# EAGLE board MTC2-Template (EAGLE 7.5.0)
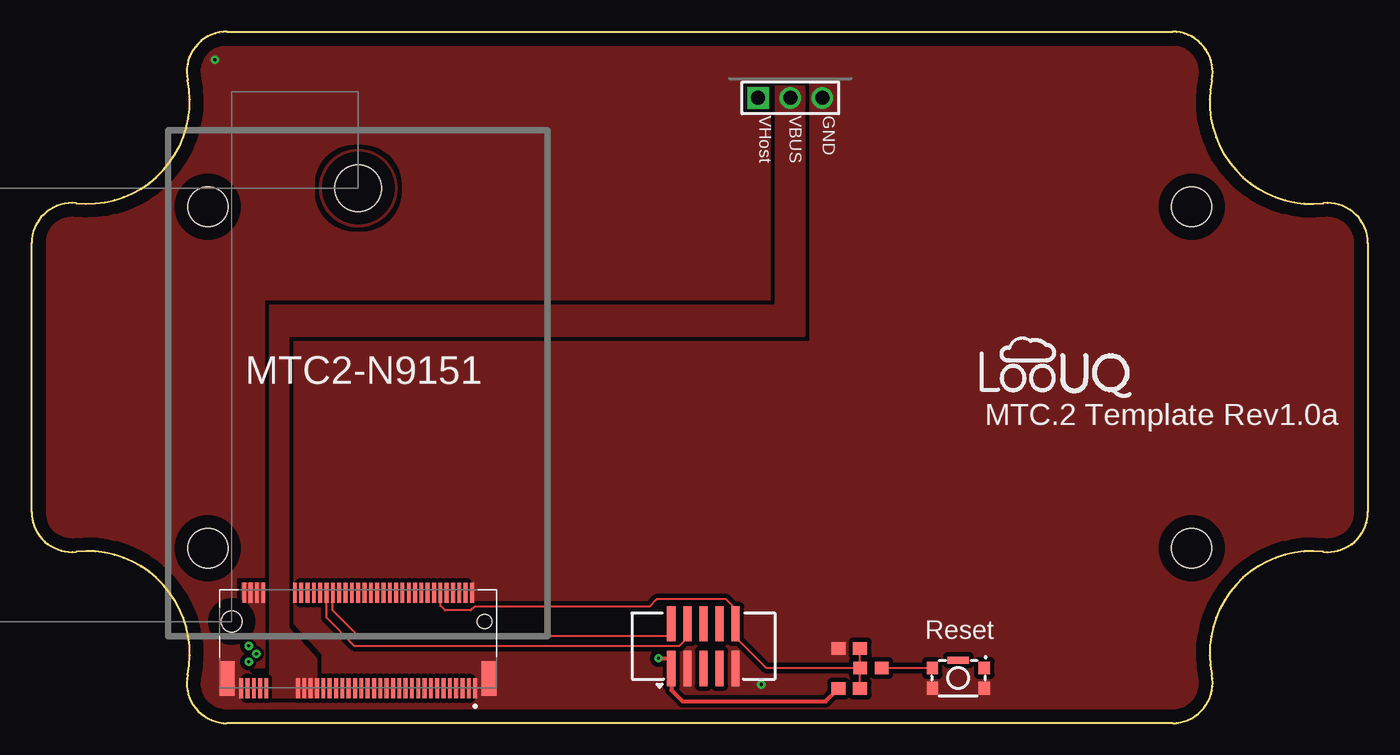
[diagram p0: board, top side]
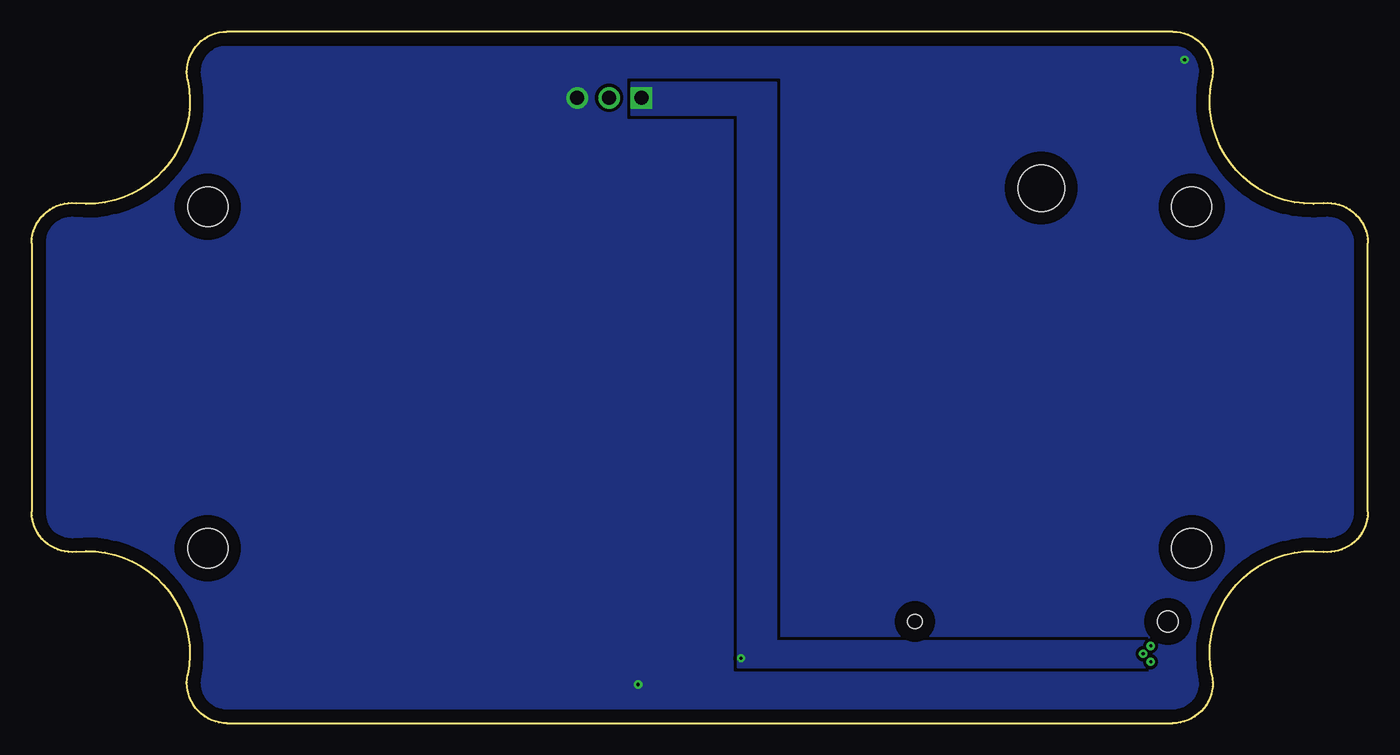
[diagram p1: board, bottom side, seen from below]

Size 105.65 x 54.66 mm. Coordinates in mm from the lower left corner, seen from the top.
Outline: 15.44,54.66 arc102 12.33,50.83 arc-108 3.52,41.1 arc96 0,37.95 0,16.71 arc96 3.52,13.55 arc-108 12.33,3.83 arc102 15.44,0 90.21,0 arc102 93.31,3.83 arc-108 102.13,13.55 arc96 105.65,16.71 105.65,37.95 arc96 102.13,41.1 arc-108 93.31,50.83 arc102 90.21,54.66 15.44,54.66
Copper layers (1*16): Top 0.035mm / dielectric 1.5mm / Bottom 0.035mm
Design rules "default *": minimum track width 10mil, minimum drill 0.61mm, track to track 8mil, track to pad 8mil, pad to pad 8mil, via to via 8mil, smd to smd 8mil, copper to edge 40mil, drill to drill 8mil, minimum pad ring 0mil, minimum via ring 8mil, stop-mask expansion 2mil, vias tented up to drill 10mil, thermal gap 10mil
Net classes: 0 Default: width 0.15 mm, clearance 0.2 mm, clearance 0.2 mm to class 1, clearance 0.2 mm to class 2, clearance 0.2 mm to class 3, clearance 0.2 mm to class 4; 1 Power: width 0.3 mm, clearance 0.2 mm, clearance 0.2 mm to class 0, clearance 0.2 mm to class 2, clearance 0.2 mm to class 3, clearance 0.2 mm to class 4; 2 BATT: width 1 mm, clearance 0.2 mm, clearance 0.2 mm to class 0, clearance 0.2 mm to class 1, clearance 0.2 mm to class 3, clearance 0.2 mm to class 4; 3 NetClass3: width 0.15 mm, clearance 0.2 mm, clearance 0.2 mm to class 0, clearance 0.2 mm to class 1, clearance 0.2 mm to class 2, clearance 0.2 mm to class 4; 4 Power-HI: width 0.6 mm, clearance 0.2 mm, clearance 0.2 mm to class 0, clearance 0.2 mm to class 1, clearance 0.2 mm to class 2, clearance 0.2 mm to class 3
Holes 3.17 mm at 13.93,40.82 13.93,13.83 91.72,40.82 91.72,13.83
Holes 3.7 mm at 25.82,42.29

## Footprints (pad centres in the part's own frame; a part is rotated, then mirrored left to right if it is on the bottom)
CAP_0603 = smd 1.1 x 1: 1 -0.85,0; 2 0.85,0
TE_1-2199230-6 = smd 0.3 x 1.55: 1 -9.25,5.275; 2 -9,-2.275; 3 -8.75,5.275; 4 -8.5,-2.275; 5 -8.25,5.275; 6 -8,-2.275; 7 -7.75,5.275; 8 -7.5,-2.275; 9 -7.25,5.275; 10 -7,-2.275; 11 -6.75,5.275; 12 -6.5,-2.275; 13 -6.25,5.275; 14 -6,-2.275; 15 -5.75,5.275; 16 -5.5,-2.275; 17 -5.25,5.275; 18 -5,-2.275; 19 -4.75,5.275; 20 -4.5,-2.275; 21 -4.25,5.275; 22 -4,-2.275; 23 -3.75,5.275; 24 -3.5,-2.275; 25 -3.25,5.275; 26 -3,-2.275; 27 -2.75,5.275; 28 -2.5,-2.275; 29 -2.25,5.275; 30 -2,-2.275; 31 -1.75,5.275; 32 -1.5,-2.275; 33 -1.25,5.275; 34 -1,-2.275; 35 -0.75,5.275; 36 -0.5,-2.275; 37 -0.25,5.275; 38 0,-2.275; 39 0.25,5.275; 40 0.5,-2.275; 41 0.75,5.275; 42 1,-2.275; 43 1.25,5.275; 44 1.5,-2.275; 45 1.75,5.275; 46 2,-2.275; 47 2.25,5.275; 48 2.5,-2.275; 49 2.75,5.275; 50 3,-2.275; 51 3.25,5.275; 52 3.5,-2.275; 53 3.75,5.275; 54 4,-2.275; 55 4.25,5.275; 56 4.5,-2.275; 57 4.75,5.275; 58 5,-2.275; 67 7.25,5.275; 68 7.5,-2.275; 69 7.75,5.275; 70 8,-2.275; 71 8.25,5.275; 72 8.5,-2.275; 73 8.75,5.275; 74 9,-2.275; 75 9.25,5.275 | smd 1.2 x 2.75: S1 -10.35,4.5; S2 10.35,4.5 | hole 1.15: -10,0 | hole 1.65: 10,0
CnCTech_3220-10-0300-00-TR = smd 0.65 x 2.77: 1 -2.54,-1.765; 2 -2.54,1.765; 3 -1.27,-1.765; 4 -1.27,1.765; 5 0,-1.765; 6 0,1.765; 7 1.27,-1.765; 8 1.27,1.765; 9 2.54,-1.765; 10 2.54,1.765
HDR-1x3T/2.54/7x2 = drill 1.1 pad 1.7 square: 1 -2.54,0 | drill 1.1 pad 1.7: 2 0,0; 3 2.54,0
RES_0603 = smd 1.1 x 1: 1 -0.85,0; 2 0.85,0
RES_0603_R2 = smd 1.1 x 1: 1 -0.85,0; 2 0.85,0
KMR-2-wG = smd 0.9 x 1: 1@ -2.05,0.4; 1@_1 2.05,0.4; 2@ 2.05,-1.2; 2@_1 -2.05,-1.2 | smd 1.7 x 0.55: S 0,1.025

## Placement (x,y rotation side)
C1  100nF  [CAP_0603]  64.64,5.91 0 top
J1  1-2199230-6  [TE_1-2199230-6]  25.82,8.04 180 top
J3  BD125-10-A-0305-0580-L-B  [CnCTech_3220-10-0300-00-TR]  53.12,6.09 0 top
J4  3PIN T/H HEADER  [HDR-1x3T/2.54/7x2]  59.98,49.42 0 top
LG1  LOOUQ LOGO  [LooUQ-6mm]  80.96,28.09 0 top
R1  10K  [RES_0603]  64.64,2.74 180 top
R2  330R  [RES_0603_R2]  66.36,4.36 0 top
SW1  KMR231GLFS  [KMR-2-wG]  73.27,3.96 0 top

## Library data of the parts
C1 = common; MANUFACTURER: Samsung
J1 = common; CENTERLINE_PITCH: .5 mm[.0197 in]; DESCRIPTION: 67 Position Female Connector M.2 (NGFF) Mini Card Gold 0.020 (0.50mm) Black; MANUFACTURER: TE Connectivity; NUMBER_OF_POSITIONS: 67; SNAPEDA_LINK: https://www.snapeda.com/parts/1-2199230-6/TE+Connectivity+AMP+Connectors/view-part/?ref=snap
J3 = common; DATASHEET: http://www.cnctech.us/pdfs/3220-XX-0300-00-TR.pdf; MANUFACTURER: GCT
J4 = common; DATASHEET: https://media.digikey.com/pdf/Data%20Sheets/3M%20PDFs/951yyy-xx22-AR_Series%20Datasheet.pdf; MANUFACTURER: 3M
LG1 = common; MANUFACTURER: PCB
R1 = common; MANUFACTURER: Stackpole
R2 = common; MANUFACTURER: Walsin Technology
SW1 = common; DATASHEET: https://www.ckswitches.com/media/1479/kmr2.pdf; MANUFACTURER: C&K

## Nets
ND_RESET: C1.2 J1.12 J3.10 R1.1 R2.1
ND_RESETSW: R2.2 SW1.1@ SW1.1@_1
ND_SWD_CLK: J1.48 J3.4
ND_SWD_IO: J1.46 J3.2
Net_GND [Power]: C1.1 J1.1 J1.2 J1.58 J1.75 J1.S1 J1.S2 J3.3 J3.9 J4.3 SW1.2@ SW1.2@_1
Net_VBus [Power]: J1.51 J1.53 J1.55 J1.57 J4.2
Net_VHOST [Power]: J1.68 J1.70 J1.72 J1.74 J3.1 J4.1 R1.2

## Tracks (layer width: path | path; a pad name or v marks a point on that pad's centre or on a via)
ND_RESET
  Top 0.15: R1.1 65.49,4.36 R2.1 | R2.1 65.51,5.89 C1.2 | J1.12 32.32,9.27 32.67,8.92 34.72,8.92 35.02,9.22 48.85,9.22 49.42,9.79 54.91,9.79 55.71,8.99 55.71,7.85 J3.10 55.7,7.81 55.7,6.76 58.11,4.36 R2.1
  pour Top (no thermals): 22.72,42.29 22.75,42.69 22.82,43.09 22.95,43.47 23.13,43.84 23.36,44.17 23.63,44.48 24.3,43.81 24.3,43.81 24.11,43.59 23.96,43.36 23.83,43.11 23.74,42.84 23.69,42.57 23.67,42.29 23.69,42.01 23.74,41.73 23.83,41.46 23.96,41.21 24.11,40.98 24.3,40.77 24.51,40.58 24.74,40.42 25,40.3 25.26,40.21 25.54,40.15 25.82,40.14 26.1,40.15 26.38,40.21 26.64,40.3 26.89,40.42 27.13,40.58 27.34,40.77 27.52,40.98 27.68,41.21 27.81,41.46 27.9,41.73 27.95,42.01 27.97,42.29 27.95,42.57 27.9,42.84 27.81,43.11 27.68,43.36 27.52,43.59 27.34,43.81 27.13,43.99 26.89,44.15 26.64,44.27 26.38,44.36 26.1,44.42 25.82,44.44 25.54,44.42 25.26,44.36 25,44.27 24.74,44.15 24.51,43.99 24.3,43.81 23.63,44.48 23.93,44.75 24.27,44.97 24.63,45.15 25.02,45.28 25.41,45.36 25.82,45.39 26.22,45.36 26.62,45.28 27.01,45.15 27.37,44.97 27.71,44.75 28.01,44.48 28.28,44.17 28.5,43.84 28.68,43.47 28.81,43.09 28.89,42.69 28.92,42.29 28.89,41.88 28.81,41.48 28.68,41.1 28.5,40.74 28.28,40.4 28.01,40.09 27.71,39.83 27.37,39.6 27.01,39.42 26.62,39.29 26.22,39.21 25.82,39.19 25.41,39.21 25.02,39.29 24.63,39.42 24.27,39.6 23.93,39.83 23.63,40.09 23.36,40.4 23.13,40.74 22.95,41.1 22.82,41.48 22.75,41.88
ND_RESETSW
  Top 0.15: SW1.1@ R2.2
ND_SWD_CLK
  Top 0.15: J3.4 51.85,6.75 51.2,6.1 25.55,6.1 23.31,8.34 J1.48
ND_SWD_IO
  Top 0.15: J3.2 50.58,7.09 50.37,6.88 25.87,6.88 23.82,8.93 J1.46
Net_GND  (via drill 0.25 pad 0.45)
  other vias: 57.7,3.06 14.49,52.44
  pour Top (isolate 0.35, rank 10, no thermals): 12.88,50.89 12.83,51.72 13.01,52.47 13.41,53.13 13.98,53.66 14.68,53.99 15.48,54.11 90.17,54.11 90.97,53.99 91.67,53.65 92.24,53.13 92.63,52.47 92.81,51.71 92.76,50.89 92.62,49.93 92.59,48.91 92.67,47.9 92.88,46.89 93.21,45.93 93.64,45 94.18,44.14 94.82,43.34 95.55,42.63 96.36,42 97.24,41.48 98.17,41.06 99.15,40.75 100.15,40.57 101.17,40.5 102.14,40.55 102.92,40.52 103.61,40.3 104.22,39.89 104.69,39.34 104.99,38.67 105.1,37.91 105.1,16.75 104.99,15.99 104.69,15.32 104.22,14.76 103.62,14.35 102.92,14.13 102.14,14.1 101.17,14.15 100.15,14.08 99.15,13.9 98.18,13.59 97.24,13.17 96.37,12.65 95.56,12.03 94.83,11.31 94.19,10.52 93.65,9.65 93.21,8.73 92.89,7.76 92.68,6.76 92.59,5.75 92.62,4.73 92.76,3.77 92.81,2.95 92.63,2.19 92.24,1.53 91.67,1.01 90.97,0.67 90.17,0.55 15.48,0.55 14.68,0.67 13.98,1 13.41,1.53 13.01,2.19 12.83,2.94 12.88,3.77 13.02,4.73 13.05,5.74 12.96,6.76 12.75,7.76 12.43,8.73 11.99,9.65 11.45,10.51 10.81,11.31 10.09,12.02 9.28,12.65 8.4,13.17 7.47,13.59 6.5,13.89 5.5,14.08 4.48,14.15 3.52,14.1 2.73,14.13 2.03,14.35 1.43,14.76 0.96,15.32 0.66,15.99 0.55,16.75 0.55,37.91 0.66,38.67 0.96,39.34 1.43,39.89 2.04,40.3 2.73,40.52 3.52,40.55 4.48,40.5 5.5,40.57 6.5,40.76 7.48,41.06 8.41,41.48 9.28,42.01 10.09,42.63 10.82,43.34 11.46,44.14 12,45.01 12.43,45.93 12.76,46.9 12.97,47.9 13.05,48.91 13.02,49.93
  pour Bottom (isolate 0.25, rank 3, no thermals): 12.88,50.89 12.83,51.72 13.01,52.47 13.41,53.13 13.98,53.66 14.68,53.99 15.48,54.11 90.17,54.11 90.97,53.99 91.67,53.65 92.24,53.13 92.63,52.47 92.81,51.71 92.76,50.89 92.62,49.93 92.59,48.91 92.67,47.9 92.88,46.89 93.21,45.93 93.64,45 94.18,44.14 94.82,43.34 95.55,42.63 96.36,42 97.24,41.48 98.17,41.06 99.15,40.75 100.15,40.57 101.17,40.5 102.14,40.55 102.92,40.52 103.61,40.3 104.22,39.89 104.69,39.34 104.99,38.67 105.1,37.91 105.1,16.75 104.99,15.99 104.69,15.32 104.22,14.76 103.62,14.35 102.92,14.13 102.14,14.1 101.17,14.15 100.15,14.08 99.15,13.9 98.18,13.59 97.24,13.17 96.37,12.65 95.56,12.03 94.83,11.31 94.19,10.52 93.65,9.65 93.21,8.73 92.89,7.76 92.68,6.76 92.59,5.75 92.62,4.73 92.76,3.77 92.81,2.95 92.63,2.19 92.24,1.53 91.67,1.01 90.97,0.67 90.17,0.55 15.48,0.55 14.68,0.67 13.98,1 13.41,1.53 13.01,2.19 12.83,2.94 12.88,3.77 13.02,4.73 13.05,5.74 12.96,6.76 12.75,7.76 12.43,8.73 11.99,9.65 11.45,10.51 10.81,11.31 10.09,12.02 9.28,12.65 8.4,13.17 7.47,13.59 6.5,13.89 5.5,14.08 4.48,14.15 3.52,14.1 2.73,14.13 2.03,14.35 1.43,14.76 0.96,15.32 0.66,15.99 0.55,16.75 0.55,37.91 0.66,38.67 0.96,39.34 1.43,39.89 2.04,40.3 2.73,40.52 3.52,40.55 4.48,40.5 5.5,40.57 6.5,40.76 7.48,41.06 8.41,41.48 9.28,42.01 10.09,42.63 10.82,43.34 11.46,44.14 12,45.01 12.43,45.93 12.76,46.9 12.97,47.9 13.05,48.91 13.02,49.93
Net_VBus
  pour Top (isolate 0.3, no thermals): 18.82,33.02 58.83,33.02 58.83,50.32 61.11,50.32 61.11,30.58 20.31,30.58 20.31,7.49 22.53,5.11 22.53,2 18.82,2
Net_VHOST  (via drill 0.25 pad 0.45)
  Top 0.3: R1.2 62.78,1.72 51.48,1.72 50.58,2.62 J3.1 50.58,5.13 v49.57,5.13
  pour Top (isolate 0.25, no thermals): 18.41,4.39 16.6,4.39 16.6,11.11 18.41,11.11
  pour Bottom (isolate 0.25, no thermals): 16.6,6.51 16.6,4.39 49.84,4.39 49.84,48.04 58.25,48.04 58.25,50.64 46.76,50.64 46.76,6.51
S$1  (via drill 0.25 pad 0.45)
  other vias: 17.78,5.49
S$2  (via drill 0.25 pad 0.45)
  other vias: 17.17,6.11
S$3  (via drill 0.25 pad 0.45)
  other vias: 17.17,4.86

## Text on the board
tPlace: VHost | VBUS | GND | MTC2-N9151 | MTC.2 Template Rev1.0a | Reset
tDocu: PCB Outline for PolyCase HD-24F/HD-25F | J4 | LG1 | J3 | C1 | R2 | SW1 | J1 | R1 | TE Part# 1-2199230-6